# Altium PCB PCB_BMS_v3.PcbDoc
Units mm, origin at the board's own origin, x right, y up, seen from the top; angles counter-clockwise.
Board outline 80 x 49.7 mm, 4 copper layers (Top Layer, Internal Plane 1, Internal Plane 2, Bottom Layer), stack 0.462 mm thick; 8 components, 10 nets, 63 pads, 4 vias.
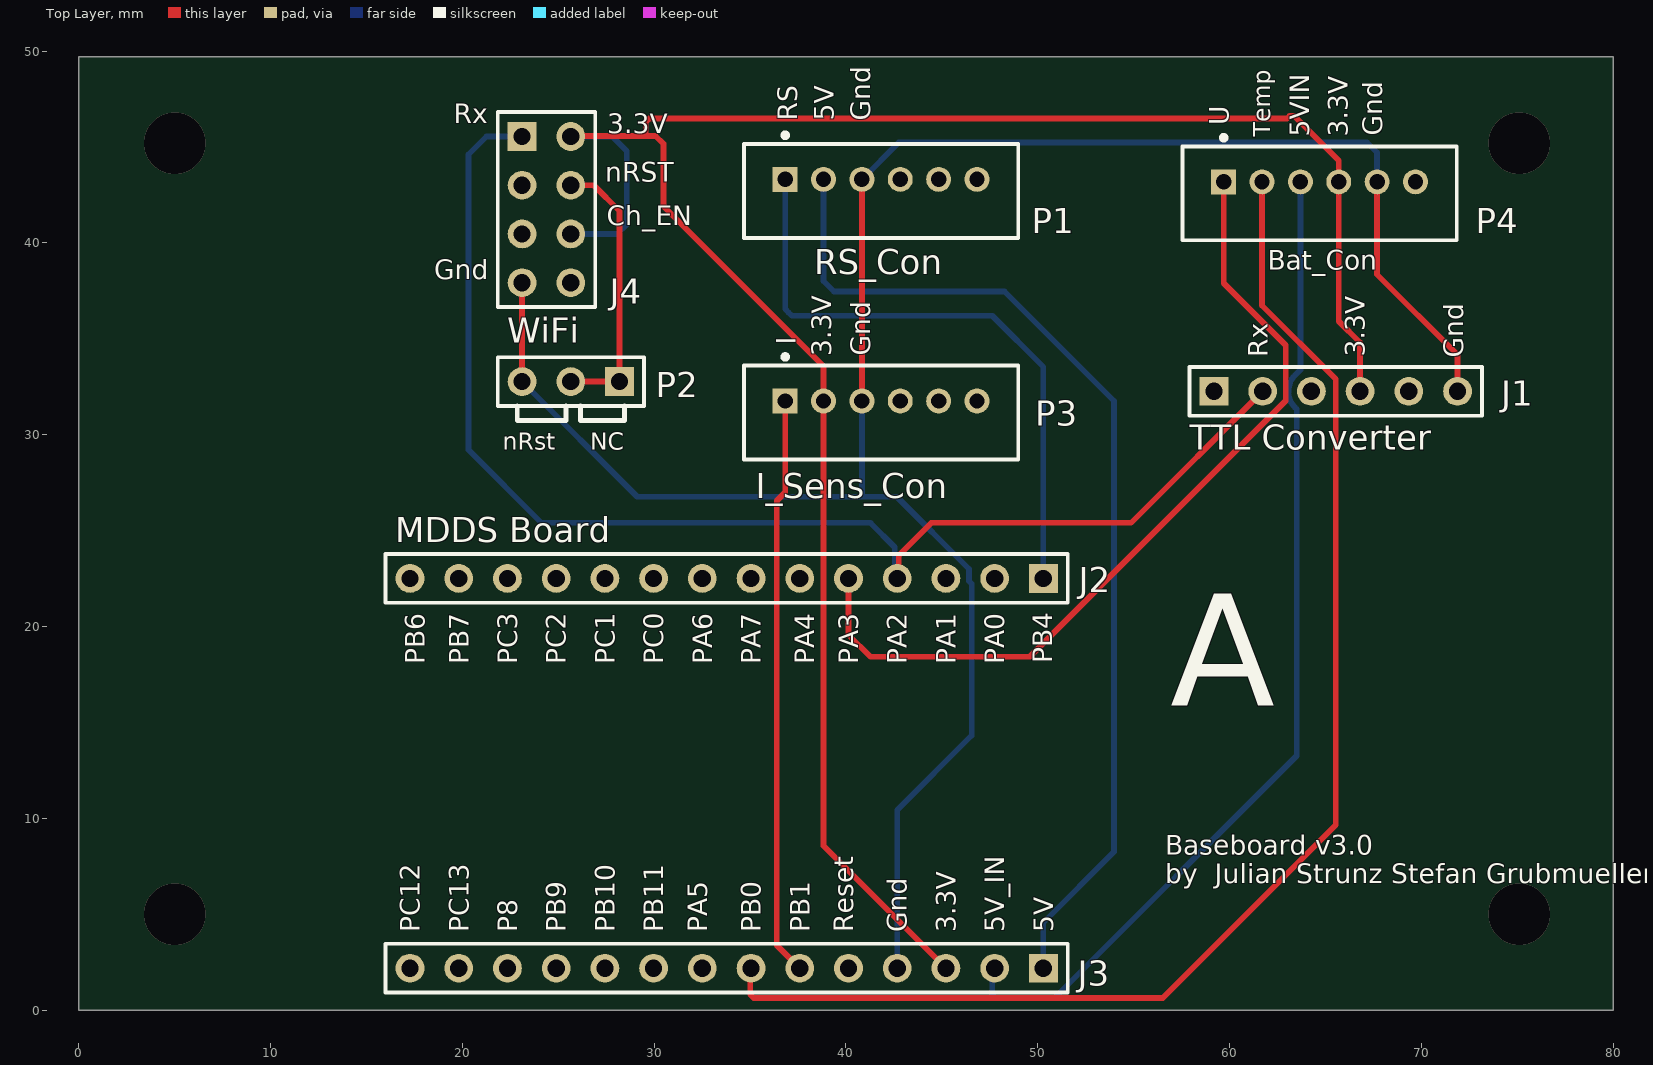
[diagram p0: Top Layer view]
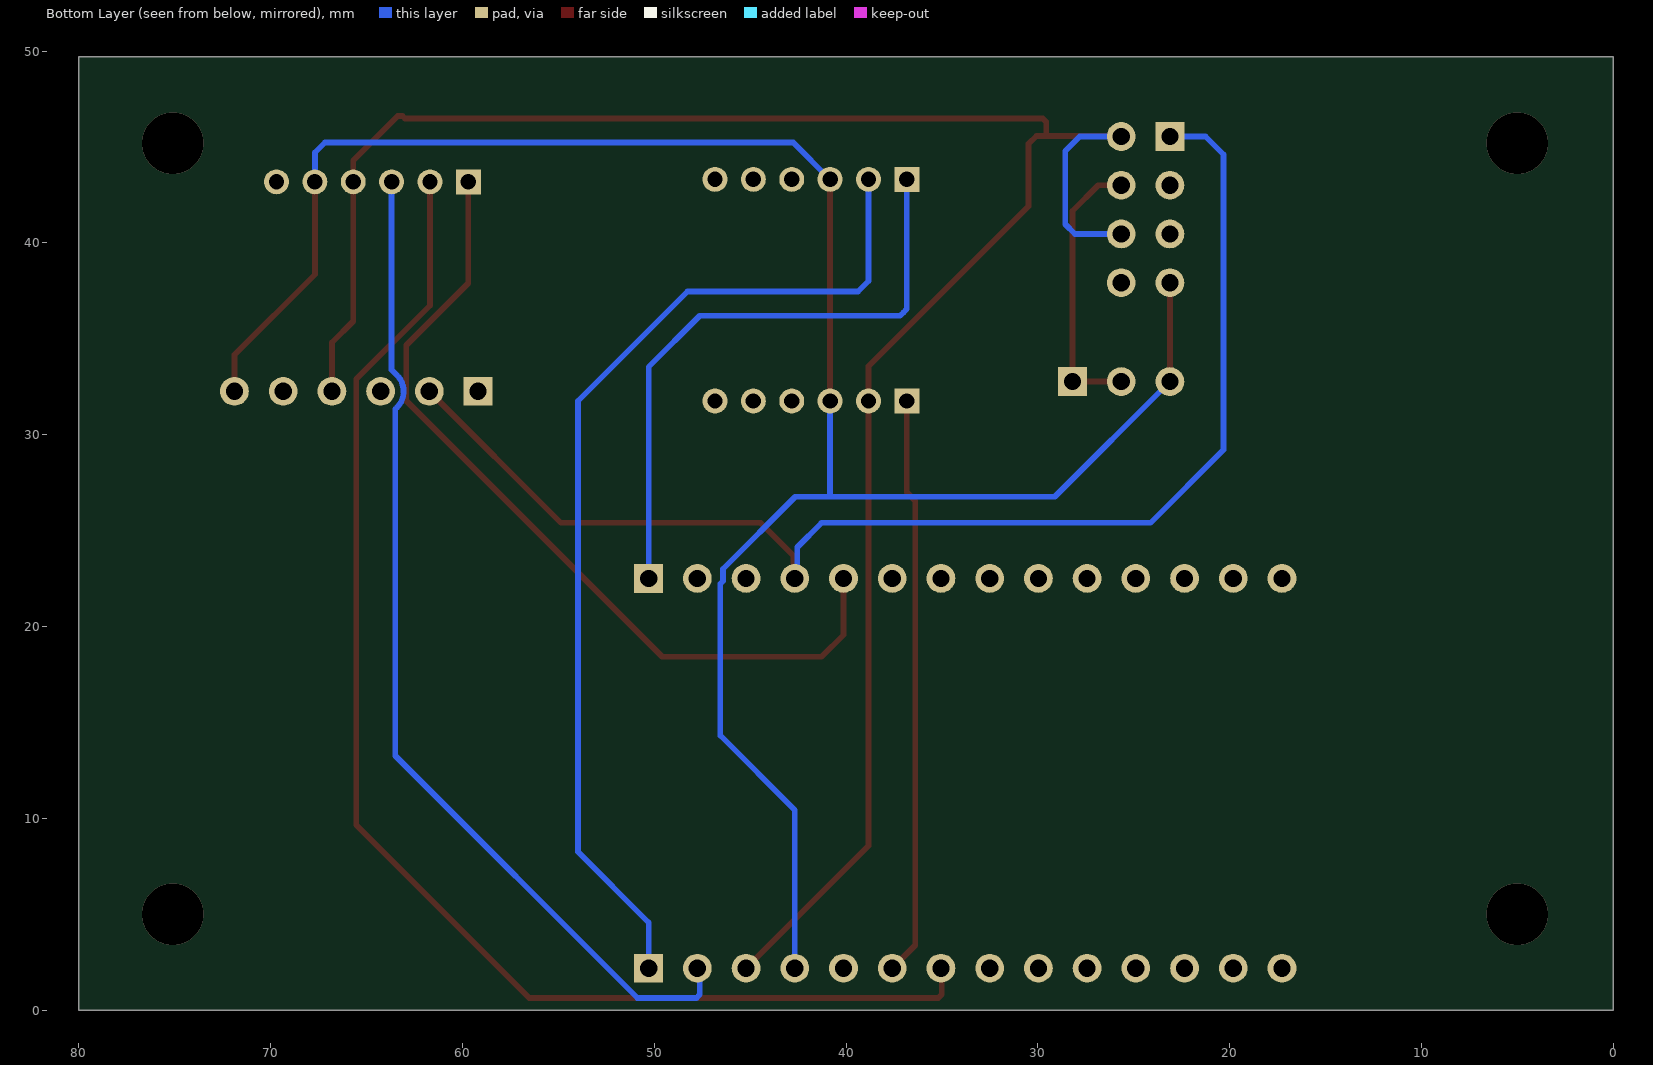
[diagram p1: Bottom Layer view, seen from below]
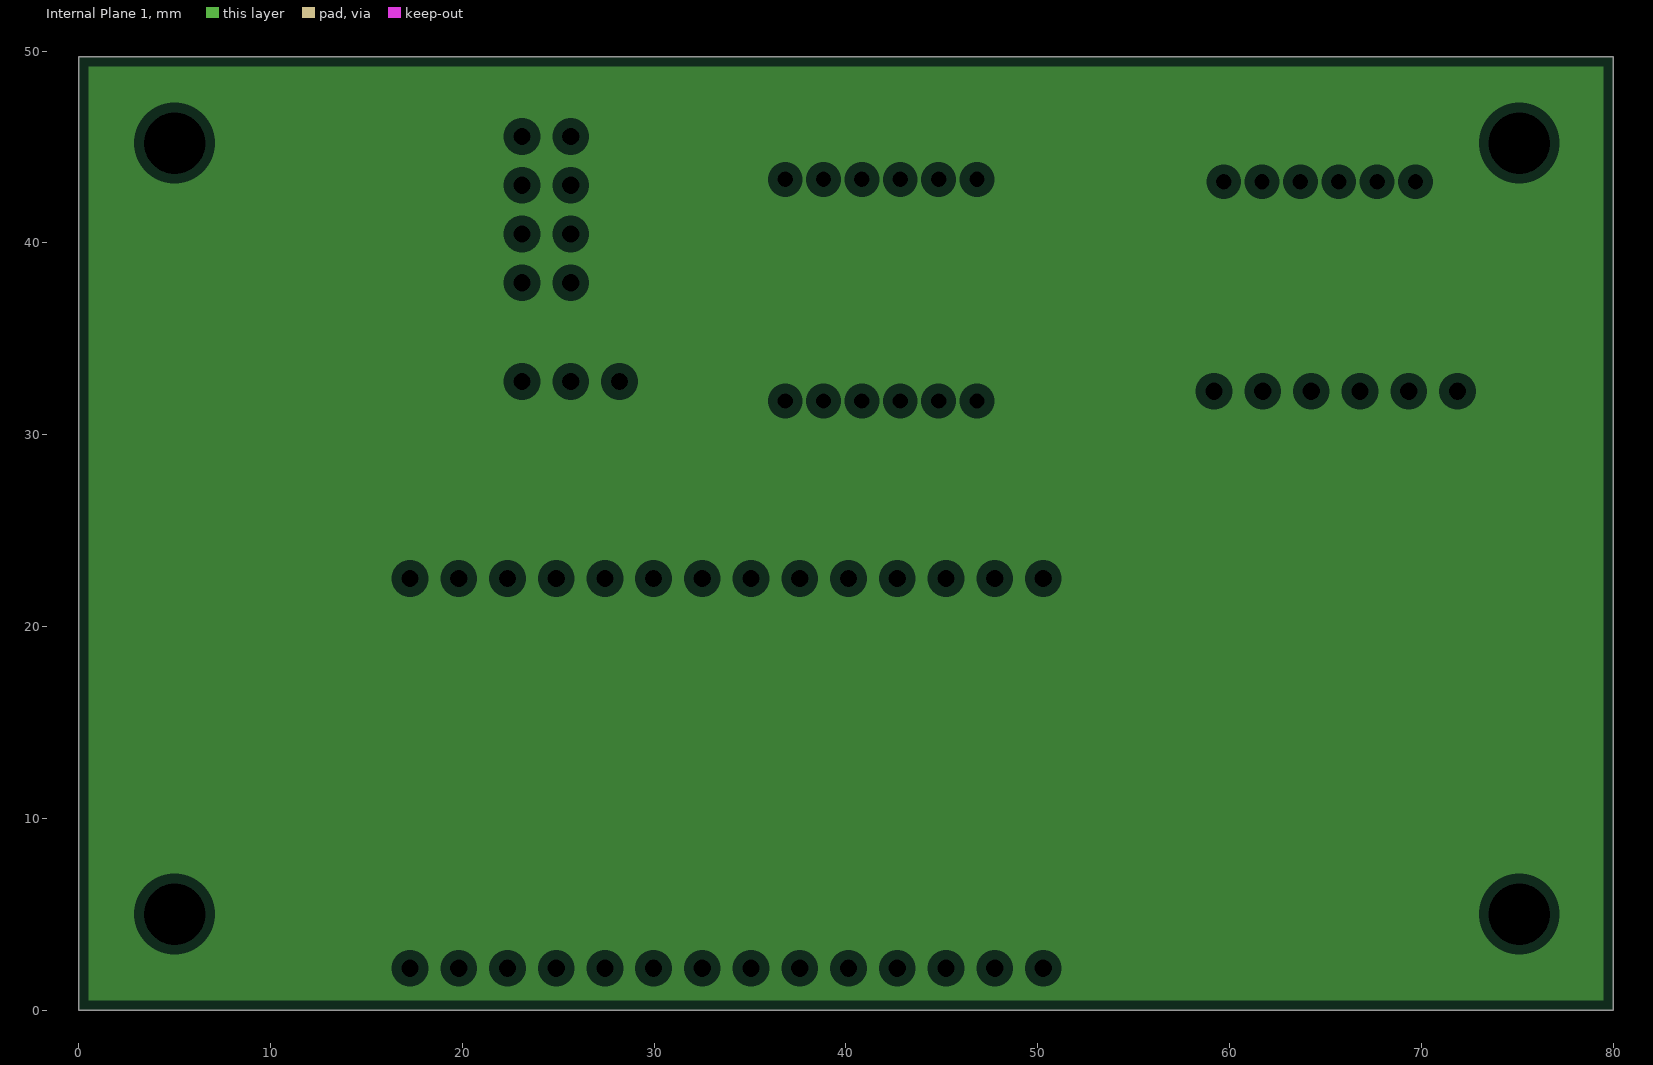
[diagram p2: Internal Plane 1, clearances drawn from the general rule]
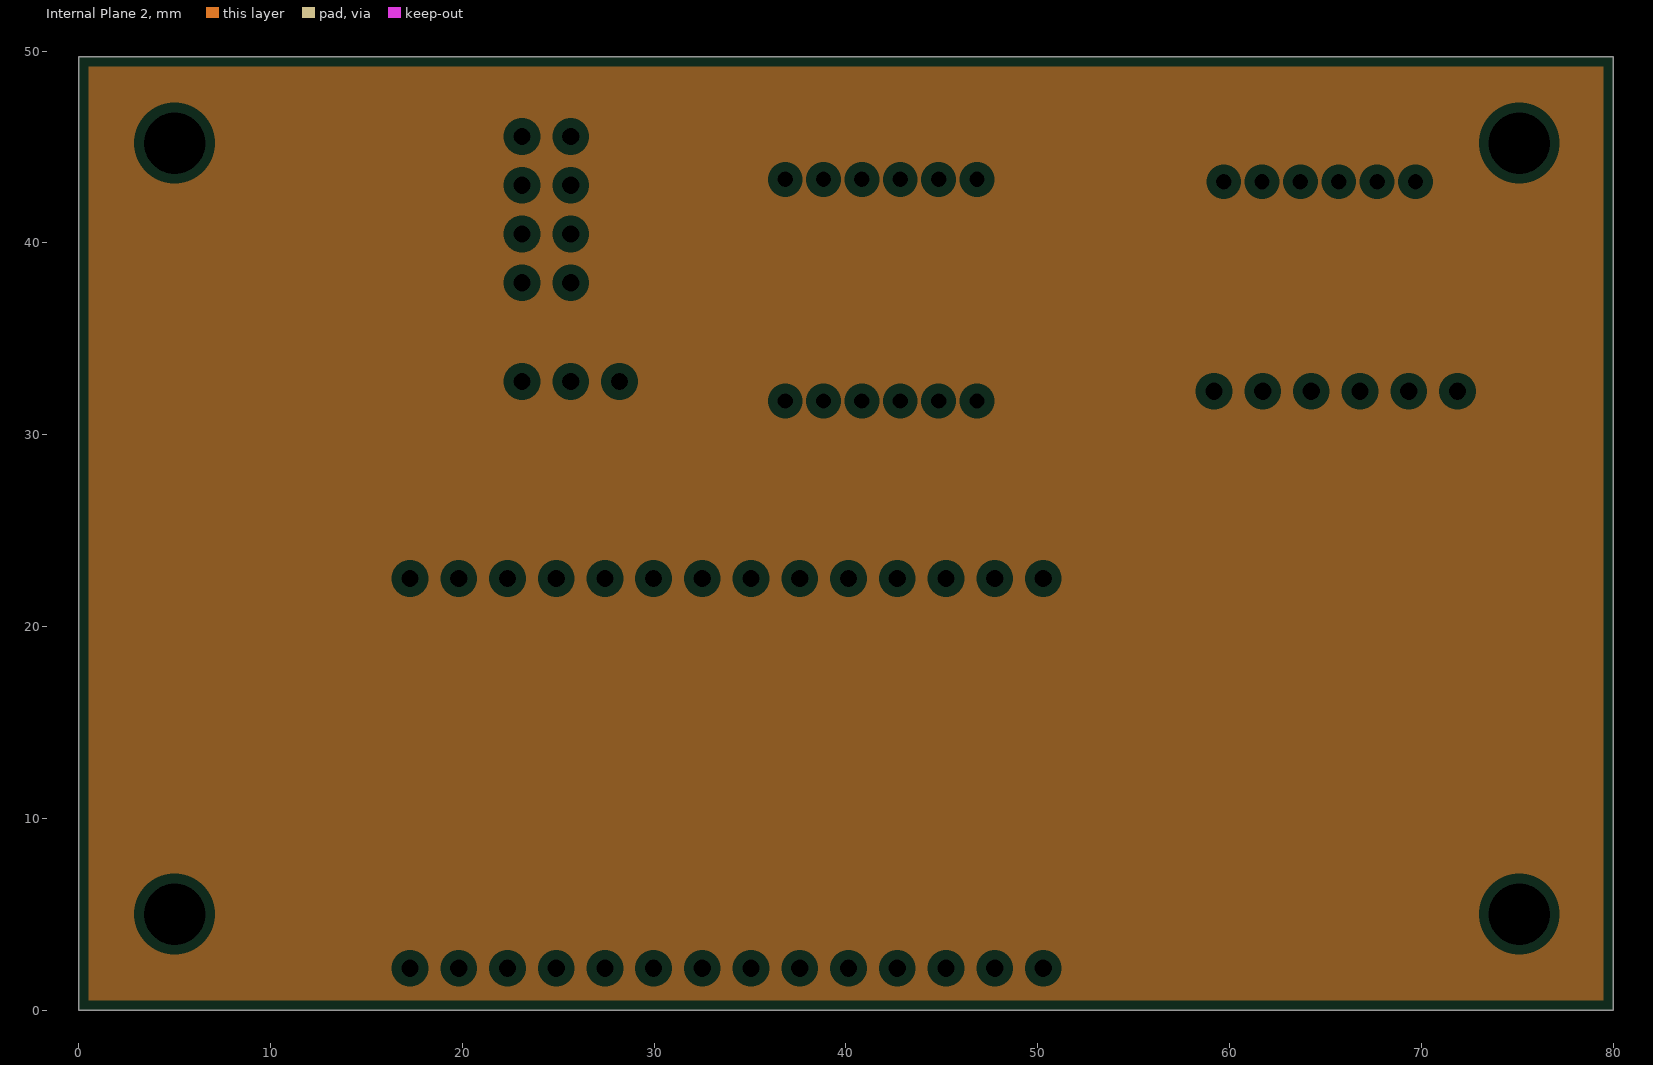
[diagram p3: Internal Plane 2, clearances drawn from the general rule]

## Layer stack, top to bottom
Top Solder: solder mask 0.0102, Solder Resist, Dk 3.5
Top Layer: signal copper 0.0356
Internal Plane 1: plane copper 0.0356
Internal Plane 2: plane copper 0.0356
Dielectric 1: dielectric 0.32, FR-4, Dk 4.8
Bottom Layer: signal copper 0.0356
Bottom Solder: solder mask 0.0102, Solder Resist, Dk 3.5

## Board outline
0,0 80,0 80,49.7 0,49.7

## Design rules (kind name [scope] priority, off if disabled: settings)
Clearance [All] p1: gap=0.3 ignorepadtopadclearanceinfootprint=FALSE
HoleSize [All] p1: absolutevalues=TRUE maxlimit=3.21 minlimit=0.025 maxpercent=80.000 minpercent=20.000
PlaneClearance [All] p1: clearance=0.508
PlaneConnect [All] p1: planeconnectstyle=Relief reliefexpansion=0.508 reliefentries=4 reliefconductorwidth=0.254 reliefairgap=0.254
PolygonConnect [All] p1: connectstyle=Relief reliefconductorwidth=0.254 reliefentries=4 polygonreliefangle="90 Angle" airgapwidth=0.254
RoutingVias [All] p1: holewidth=0.8 width=1.6 viastyle="Through Hole" minholewidth=0.711 minwidth=1.27 maxholewidth=0.711 maxwidth=1.27
SilkToSilkClearance [All] p1: silktosilkclearance=0.251
SolderMaskExpansion [All] p1: expansion=0.102 istentingtop=FALSE
Width [All] p1: maxlimit=0.3 minlimit=0.3 preferedwidth=0.3
26 further rules are at their usual default settings.

## Components (designator, comment, footprint, x,y, rotation, side; value= is the part's Value field where it differs from the comment)
J1 "TTL-Wandler" HDR1X6 59.182,32.258 r0 top
J2 "Header 14" HDR1X14 50.29,22.504 r180 top
J3 "Header 14" HDR1X14 50.29,2.184 r180 top
J4 "ESP8266-01" HDR2X4 23.114,45.542 r270 top
P1 "Relais Adapter" 62000611622 41.83,42.707 r180 top
P2 "Jumper" HDR1X3 28.194,32.766 r180 top
P3 "Stromsensor Adapter" 62000611622 41.83,31.15 r180 top
P4 "Batterie Adapter" 62000611622 64.69,42.58 r180 top

## Footprints (in the part's own frame and the unit in brackets; to place one, negate y for a bottom-side part, rotate by r counter-clockwise, add the part's x,y. Pads: shape width x height; smd on the part's side, far side on the other; paste and mask are expansions set on the pad)
62000611622 [mm] "2.00mm Male Vertical Shrouded Header, 6p"
  rect 1.3x1.3 hole 0.8: 1(5,-0.6)
  round 1.3 hole 0.8: 2(3,-0.6) 3(1,-0.6) 4(-1,-0.6) 5(-3,-0.6) 6(-5,-0.6)
  silkscreen extent -7.15,-3.02 7.15,2.45, body extent -7,-2.35 7,2.35, height 6.13
HDR1X3 [mm] "Connector; Header; 3 Position"
  rect 1.5x1.5 hole 0.9: 1(0,0)
  round 1.5 hole 0.9: 2(2.54,0) 3(5.08,0)
  silkscreen extent -1.27,-1.27 6.35,1.27
HDR1X6 [mm] "Connector; Header; 6 Position"
  rect 1.5x1.5 hole 0.9: 1(0,0)
  round 1.5 hole 0.9: 2(2.54,0) 3(5.08,0) 4(7.62,0) 5(10.16,0) 6(12.7,0)
  silkscreen extent -1.27,-1.27 13.97,1.27
HDR1X14 [mm] "Connector; Header; 14 Position"
  rect 1.5x1.5 hole 0.9: 1(0,0)
  round 1.5 hole 0.9: 2(2.54,0) 3(5.08,0) 4(7.62,0) 5(10.16,0) 6(12.7,0) 7(15.24,0) 8(17.78,0) 9(20.32,0) 10(22.86,0) 11(25.4,0) 12(27.94,0) 13(30.48,0) 14(33.02,0)
  silkscreen extent -1.27,-1.27 34.29,1.27
HDR2X4 [mm] "Connector; Header; 4x2 Position"
  rect 1.5x1.5 hole 0.9: 1(0,0)
  round 1.5 hole 0.9: 2(0,2.54) 3(2.54,0) 4(2.54,2.54) 5(5.08,0) 6(5.08,2.54) 7(7.62,0) 8(7.62,2.54)
  silkscreen extent -1.27,-1.27 8.89,3.81

## Part data
J1: library part "Header 6", "Header, 6-Pin", LatestRevisionDate=17-Jul-2002, LatestRevisionNote="Re-released for DXP Platform.", Publisher="Altium Limited"
J2 J3: "Header, 14-Pin", LatestRevisionDate=17-Jul-2002, LatestRevisionNote="Re-released for DXP Platform.", Publisher="Altium Limited"
J4: library part "Header 4X2", "Header, 4-Pin, Dual row", LatestRevisionDate=17-Jul-2002, LatestRevisionNote="Re-released for DXP Platform.", Publisher="Altium Limited"
P1 P3 P4: library part 62000611622, "WR-WTB Male Vertical Shrouded Header, pitch 2mm, 6p", Contact Resistance=20mOhm, Operating Temperature="-25 to +85degC", Rated Current=2A, Withstanding Voltage=800VAC, Working Voltage=125VAC, ComponentLink1Description=Manufacturer, ComponentLink1URL=http://www.we-online.de, ComponentLink2Description=Datasheet, ComponentLink2URL=https://www.we-online.com/catalog/datasheet/62000611622.pdf, Gender=Male, Mounting Technology=THT, Packaging=Bag, Part Number=62000611622, Pin Number=6, Pitch=2mm, Published Date="January 2020", Publisher="Wurth Elektronik", Type=Vertical
P2: library part "Header 3", "Header, 3-Pin", LatestRevisionDate=17-Jul-2002, LatestRevisionNote="Re-released for DXP Platform.", Publisher="Altium Limited"

## Via types
v1: diameter 3.2, hole 3.2, Top Layer to Bottom Layer, 4 vias

## Nets (pads, with @x,y where several pads share a name; then routed paths per layer and width w, separated by ;. In a path a pad name is that pad's centre, name@x,y a point inside that pad or via, vN(x,y) a via of type N, cw(c..) or ccw(c..) an arc to the next point about the centre after c; other vN are vias at no path point)
+3.3V: J1.4 J3.3 J4.2 J4.6 P3.2 P4.4 | length 114.7
  Top Layer w0.3: J4.2 25.679,45.568 29.566,45.568 ; J3.3 38.83,8.564 P3.2 38.83,33.56 30.48,41.91 30.48,45.161 30.074,45.568 29.566,45.568 ; J1.4 66.802,34.798 65.69,35.91 P4.4 65.69,44.292 63.37,46.612 63.122,46.612 62.992,46.482 29.741,46.482 29.566,46.306 29.566,45.568
  Bottom Layer w0.3: J4.6 28.067,40.462 28.575,40.97 28.575,44.78 27.813,45.542 J4.2
+5V: J3.1 P1.2 | length 54.1
  Bottom Layer w0.3: P1.2 38.83,38.005 39.37,37.465 48.26,37.465 53.975,31.75 53.975,8.255 50.29,4.57 J3.1
"+5V IN": J3.2 P4.3 | length 52.9
  Bottom Layer w0.3: J3.2 47.625,2.059 47.625,0.811 47.801,0.635 50.877,0.635 63.5,13.258 63.5,31.323 63.413,31.409 cw(c64.262,32.258) 63.45,33.142 63.474,33.164 ccw(c63.263,33.377) 63.475,33.165 63.5,33.19 63.5,33.193 63.69,33.383 P4.3
Gnd: J1.6 J3.4 J4.7 P1.3 P2.3 P3.3 P4.5 | length 113.9
  Top Layer w0.3: P2.3 J4.7 ; P3.3 P1.3 P1.3@41.005,43.132 ; P4.5 67.69,38.355 71.882,34.163 J1.6
  Bottom Layer w0.3: P2.3 29.115,26.765 40.735,26.765 ; P3.3 40.83,26.86 40.735,26.765 ; P1.3 42.754,45.231 67.164,45.231 67.69,44.705 P4.5 ; J3.4 42.67,10.427 46.55,14.307 46.55,22.225 46.41,22.365 46.41,23.001 42.646,26.765 40.735,26.765
NetJ1_2: J1.2 J2.4 J4.1 | length 68.3
  Top Layer w0.3: J2.4 42.754,22.588 42.754,23.704 44.45,25.4 54.864,25.4 J1.2
  Bottom Layer w0.3: J4.1 21.26,45.542 20.32,44.602 20.32,29.21 24.13,25.4 41.275,25.4 42.545,24.13 42.545,22.629 J2.4
NetJ2_1: J2.1 P1.1 | length 32.7
  Top Layer w0.3: J2.1@50.165,22.379 J2.1
  Bottom Layer w0.3: P1.1 36.83,36.547 37.006,36.371 37.182,36.195 47.625,36.195 50.29,33.53 J2.1
NetJ2_5: J2.5 P4.1 | length 44.5
  Top Layer w0.3: J2.5 40.13,19.56 41.275,18.415 49.576,18.415 62.922,31.761 62.922,34.654 59.69,37.886 P4.1
NetJ3_6: J3.6 P3.1 | length 30.2
  Top Layer w0.3: P3.1 36.83,26.991 36.39,26.551 36.39,3.384 J3.6
NetJ3_7: J3.7 P4.2 | length 70.8
  Top Layer w0.3: J3.7 35.013,2.147 35.013,0.811 35.189,0.635 56.515,0.635 65.532,9.652 65.532,32.893 61.69,36.735 P4.2
NetJ4_4: J4.4 P2.1 P2.2 | length 14.5
  Top Layer w0.3: P2.2 P2.1 28.194,41.656 26.854,42.996 25.66,42.996 J4.4
pads on no net: J1.1 J1.3 J1.5 J2.2 J2.3 J2.6 J2.7 J2.8 J2.9 J2.10 J2.11 J2.12 J2.13 J2.14 J3.5 J3.8 J3.9 J3.10 J3.11 J3.12 J3.13 J3.14 J4.3 J4.5 J4.8 P1.4 P1.5 P1.6 P3.4 P3.5 P3.6 P4.6
copper on no net:
  other v1: 5,5 75.1,5 5,45.2 75.1,45.2

## Silkscreen, mask and mechanical layers (free items; w line width, h text height)
Top Overlay:
  lines w0.254: 22.86,31.496 22.86,30.734 25.4,30.734 25.4,31.496 ; 26.162,31.496 26.162,30.734 27.432,30.734 28.448,30.734 28.448,31.496
  text "RS" at 37.465,46.355 h1 r90
  text "5V" at 39.37,46.355 h1 r90
  text "Gnd" at 41.275,46.355 h1 r90
  text "Rx" at 19.558,46.228 h1
  text "U" at 59.944,46.126 h1 r90
  text "3.3V" at 27.559,45.72 h1
  text "Gnd" at 67.97,45.593 h1 r90
  text "Temp" at 62.128,45.517 h0.9 r90
  text "5VIN" at 64.16,45.517 h1 r90
  text "3.3V" at 66.167,45.517 h1 r90
  text "nRST" at 27.457,43.18 h1
  text "Ch_EN" at 27.534,40.919 h1
  text "Bat_Con" at 61.976,38.608 h1
  text "RS_Con" at 38.354,38.354 h1.3
  text "Gnd" at 18.542,38.1 h1
  text "WiFi" at 22.352,34.798 h1.3
  text "I" at 37.37,34.684 h1 r90
  text "Gnd" at 41.275,34.112 h1 r90
  text "3.3V" at 39.243,34.087 h1 r90
  text "3.3V" at 67.056,34.061 h1 r90
  text "Rx" at 61.976,34.036 h1 r90
  text "Gnd" at 72.187,34.011 h1 r90
  text "nRst" at 22.098,29.21 h0.9
  text "NC" at 26.67,29.21 h0.9
  text "TTL Converter" at 57.912,29.21 h1.3
  text "I_Sens_Con" at 35.306,26.67 h1.3
  text "MDDS Board" at 16.51,24.384 h1.3
  text "PB4" at 50.749,18.085 h1 r90
  text "PB6" at 18.034,18.034 h1 r90
  text "PB7" at 20.32,18.034 h1 r90
  text "PC3" at 22.86,18.034 h1 r90
  text "PC2" at 25.4,18.034 h1 r90
  text "PC1" at 27.94,18.034 h1 r90
  text "PC0" at 30.48,18.034 h1 r90
  text "PA6" at 33.02,18.034 h1 r90
  text "PA7" at 35.56,18.034 h1 r90
  text "PA4" at 38.354,18.034 h1 r90
  text "PA3" at 40.64,18.034 h1 r90
  text "PA2" at 43.18,18.034 h1 r90
  text "PA1" at 45.72,18.034 h1 r90
  text "PA0" at 48.26,18.034 h1 r90
  text "A" at 56.896,13.97 h10
  text "Baseboard v3.0 / by  Julian Strunz Stefan Grubmueller" at 56.642,6.604 h1
  text "PC12" at 17.78,4.064 h1 r90
  text "PC13" at 20.32,4.064 h1 r90
  text "P8" at 22.86,4.064 h1 r90
  text "PB9" at 25.4,4.064 h1 r90
  text "PB10" at 27.94,4.064 h1 r90
  text "PB11" at 30.48,4.064 h1 r90
  text "PA5" at 32.766,4.064 h1 r90
  text "PB0" at 35.56,4.064 h1 r90
  text "PB1" at 38.1,4.064 h1 r90
  text "Reset" at 40.386,4.064 h1 r90
  text "Gnd" at 43.18,4.064 h1 r90
  text "3.3V" at 45.72,4.064 h1 r90
  text "5V_IN" at 48.26,4.064 h1 r90
  text "5V" at 50.8,4.064 h1 r90

## Dimensions
80,50 to 80,0 on Mechanical 1
0,50 to 80,50 on Mechanical 1